# Altium PCB PCB.PcbDoc
Units mm, origin at the board's own origin, x right, y up, seen from the top; angles counter-clockwise.
Board outline 65 x 65 mm, 4 copper layers (Top Layer, Int1, Int2, Bottom Layer), stack 1.369 mm thick; 92 components, 54 nets, 330 pads, 9 vias.
Unrouted connection lines stored in the file: 207.
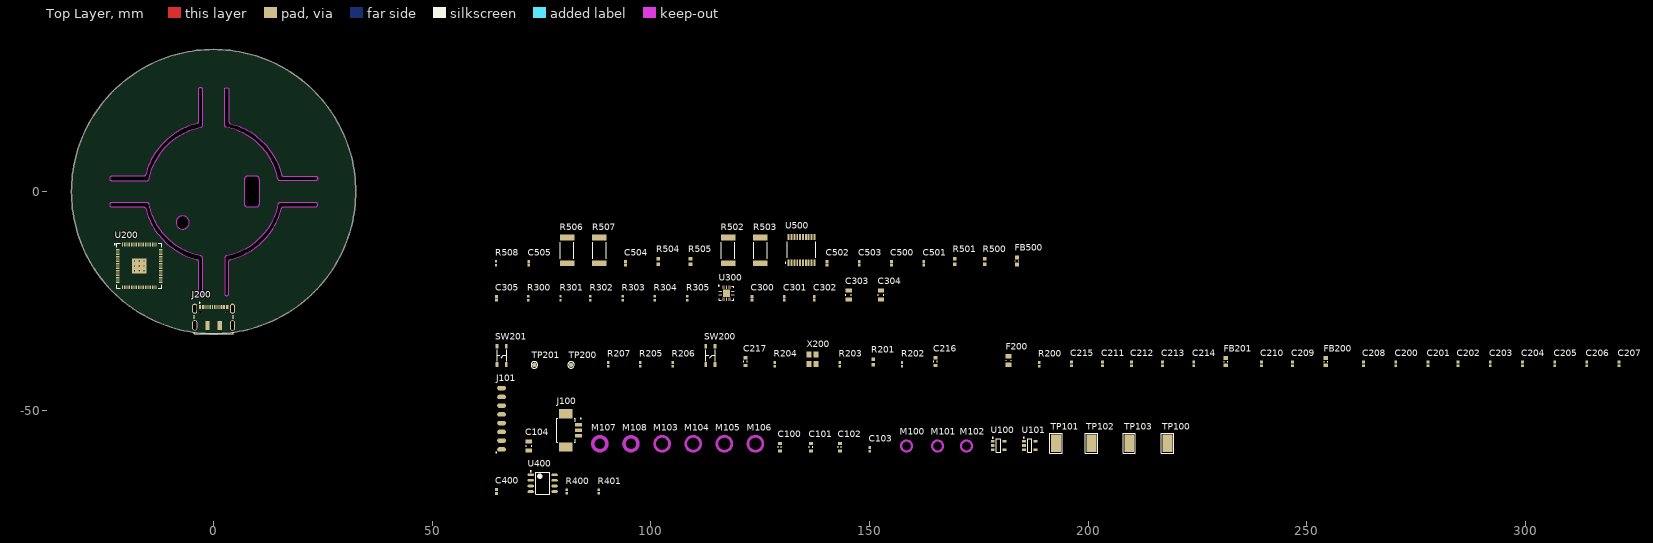
[diagram p0: Top Layer view]
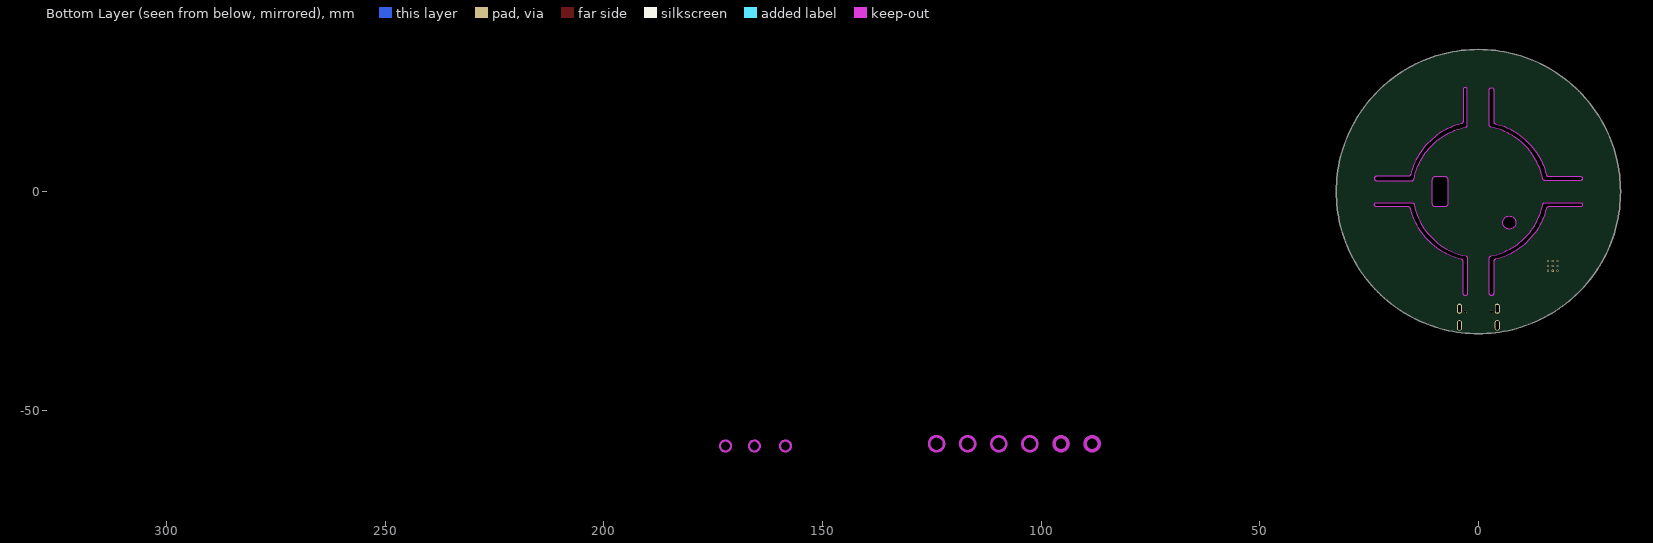
[diagram p1: Bottom Layer view, seen from below]

## Layer stack, top to bottom
Top Solder: solder mask 0.0254, SM-001, Dk 4
Top Layer: signal copper 0.035
Dielectric 1: prepreg 0.1295, PP-017, Dk 4.3
Dielectric 2: prepreg 0.1295, PP-017, Dk 4.3
Int1: signal copper 0.035
Dielectric 3: core 0.7112, Core-039, Dk 4.8
Int2: signal copper 0.035
Dielectric 4: prepreg 0.1295, PP-017, Dk 4.3
Dielectric 5: prepreg 0.1295, PP-017, Dk 4.3
Bottom Layer: signal copper 0.035
Bottom Solder: solder mask 0.0254, SM-001, Dk 4

## Board outline
-32.5,0 ccw(c0,0) 0,-32.5 ccw(c0,0) 32.5,0 ccw(c0,0) 0,32.5 ccw(c0,0)
cut-out: 7,-2.75 ccw(c7.75,-2.75) 7.75,-3.5 9.75,-3.5 ccw(c9.75,-2.75) 10.5,-2.75 10.5,2.75 ccw(c9.75,2.75) 9.75,3.5 7.75,3.5 ccw(c7.75,2.75) 7,2.75
cut-out: 2.5,23.29 cw(c3,23.29) 3.5,23.29 3.502,16.007 ccw(c4.002,16.007) 3.88,15.522 cw(c0,0) 15.522,3.881 ccw(c16.008,4.002) 16.007,3.502 16.007,3.5 23.29,3.5 cw(c23.29,3) 23.29,2.5 15.207,2.5 cw(c15.207,3) 14.716,2.903 14.715,2.908 ccw(c0,0) 2.913,14.714 cw(c3.01,15.205) 2.51,15.205
cut-out: -23.29,2.5 -15.205,2.51 ccw(c-15.205,3.01) -14.714,2.913 cw(c0,0) -2.908,14.715 -2.903,14.716 ccw(c-3,15.207) -2.5,15.207 -2.5,23.29 ccw(c-3,23.29) -3.5,23.29 -3.5,16.007 -3.502,16.007 cw(c-4.002,16.007) -3.88,15.522 ccw(c0,0) -15.522,3.881 cw(c-16.007,4.002) -16.007,3.502 -23.29,3.5 ccw(c-23.29,3)
cut-out: 2.5,-23.29 ccw(c3,-23.29) 3.5,-23.29 3.5,-16.007 3.502,-16.007 cw(c4.002,-16.007) 3.88,-15.522 ccw(c0,0) 15.522,-3.881 cw(c16.007,-4.002) 16.007,-3.502 23.29,-3.5 ccw(c23.29,-3) 23.29,-2.5 15.205,-2.51 ccw(c15.205,-3.01) 14.714,-2.913 cw(c0,0) 2.908,-14.715 2.903,-14.716 ccw(c3,-15.207) 2.5,-15.207
cut-out: -23.29,-3.5 -16.007,-3.5 -16.007,-3.502 cw(c-16.007,-4.002) -15.522,-3.88 ccw(c0,0) -3.881,-15.522 cw(c-4.002,-16.007) -3.502,-16.007 -3.5,-23.29 ccw(c-3,-23.29) -2.5,-23.29 -2.51,-15.205 ccw(c-3.01,-15.205) -2.913,-14.714 cw(c0,0) -14.715,-2.908 -14.716,-2.903 ccw(c-15.207,-3) -15.207,-2.5 -23.29,-2.5 ccw(c-23.29,-3)
cut-out: -8.571,-7.071 ccw(c-7.071,-7.071) -7.071,-8.571 ccw(c-7.071,-7.071) -5.571,-7.071 ccw(c-7.071,-7.071) -7.071,-5.571 ccw(c-7.071,-7.071)

## Design rules (kind name [scope] priority, off if disabled: settings)
Clearance [All] p1: gap=0.254 ignorepadtopadclearanceinfootprint=FALSE
DiffPairsRouting [All] p1: maxlimit=0.254 minlimit=0.254 mostfreqgap=0.254 toplayer_minwidth=0.381 toplayer_maxwidth=0.381 toplayer_prefwidth=0.381 midlayer1_minwidth=0.381 midlayer1_maxwidth=0.381 midlayer1_prefwidth=0.381 midlayer2_minwidth=0.381 midlayer2_maxwidth=0.381 midlayer2_prefwidth=0.381 bottomlayer_minwidth=0.381 bottomlayer_maxwidth=0.381 bottomlayer_prefwidth=0.381 maxuncoupledlength=12.7
PolygonConnect [All] p1: connectstyle=Relief reliefconductorwidth=0.254 reliefentries=4 polygonreliefangle="90 Angle" airgapwidth=0.254
RoutingVias [All] p1: holewidth=0.711 width=1.27 viastyle="Through Hole" minholewidth=0.711 minwidth=1.27 maxholewidth=0.711 maxwidth=1.27
SolderMaskExpansion [All] p1: expansion=0 istentingtop=FALSE
SupplyNets "Schematic Supply Nets_5" [InNet('+3V3')] p1: voltage=0.000
SupplyNets "Schematic Supply Nets_4" [InNet('AGND')] p2: voltage=0.000
SupplyNets "Schematic Supply Nets_3" [InNet('GND')] p3: voltage=0.000
SupplyNets "Schematic Supply Nets_2" [InNet('P5VUSB')] p4: voltage=0.000
SupplyNets "Schematic Supply Nets_1" [InNet('P1V1')] p5: voltage=0.000
SupplyNets "Schematic Supply Nets" [InNet('P3V3')] p6: voltage=0.000
Width [All] p1: maxlimit=0.254 minlimit=0.254 preferedwidth=0.254
29 further rules are at their usual default settings.

## Classes and differential pairs
component class Strain_sensor: C500 C501 C502 C503 C504 C505 FB500 R500 R501 R502 R503 R504 R505 R506 R507 R508 U500
component class Motor_driver: C300 C301 C302 C303 C304 C305 R300 R301 R302 R303 R304 R305 U300
component class Microcontroller: C200 C201 C202 C203 C204 C205 C206 C207 C208 C209 C210 C211 C212 C213 C214 C215 C216 C217 F200 FB200 FB201 J200 R200 R201 R202 R203 R204 R205 R206 R207 SW200 SW201 TP200 TP201 U200 X200
component class Main: C100 C101 C102 C103 C104 J100 J101 M100 M101 M102 M103 M104 M105 M106 M107 M108 TP100 TP101 TP102 TP103 U100 U101
component class Magnetic_encoder: C400 R400 R401 U400
differential pair USB: +USB_P -USB_N

## Components (designator, comment, footprint, x,y, rotation, side; value= is the part's Value field where it differs from the comment)
C100 "CAP" C0603 129.475,-58.424 r90 top value=1uF
C101 "CAP" C0603 136.587,-58.424 r90 top value=1uF
C102 "CAP" C0603 143.191,-58.424 r90 top value=1uF
C103 "CAP" C0402 150.049,-58.932 r90 top value=1uF
C104 "CAP" C0805 72.071,-58.17 r90 top value=10uF
C200 "CAP" C0402 270.318,-39.374 r90 top value=100nF
C201 "CAP" C0402 277.684,-39.374 r90 top value=100nF
C202 "CAP" C0402 284.542,-39.374 r90 top value=100nF
C203 "CAP" C0402 291.908,-39.374 r90 top value=100nF
C204 "CAP" C0402 299.274,-39.374 r90 top value=100nF
C205 "CAP" C0402 306.64,-39.374 r90 top value=100nF
C206 "CAP" C0402 314.006,-39.374 r90 top value=100nF
C207 "CAP" C0402 321.372,-39.374 r90 top value=100nF
C208 "CAP" C0402 262.952,-39.374 r90 top value=4.7uF
C209 "CAP" C0402 246.696,-39.374 r90 top value=1uF
C210 "CAP" C0402 239.584,-39.374 r90 top value=100nF
C211 "CAP" C0402 203.262,-39.374 r90 top value=100nF
C212 "CAP" C0402 209.866,-39.374 r90 top value=100nF
C213 "CAP" C0402 216.978,-39.374 r90 top value=100nF
C214 "CAP" C0402 224.09,-39.374 r90 top value=100nF
C215 "CAP" C0402 196.15,-39.374 r90 top value=1uF
C216 "CAP" C0603 165.035,-38.866 r90 top value=33pF
C217 "CAP" C0603 121.601,-38.866 r90 top value=33pF
C300 "CAP" C0402 123.125,-24.388 r90 top value=100nF
C301 "CAP" C0402 130.491,-24.388 r90 top value=100nF
C302 "CAP" C0402 137.349,-24.388 r90 top value=100nF
C303 "CAP" C0805 145.223,-23.626 r90 top value=10uF
C304 "CAP" C0805 152.589,-23.626 r90 top value=10uF
C305 "CAP" C0402 64.705,-24.388 r90 top value=100nF
C400 "CAP" C0402 64.705,-68.584 r90 top value=100nF
C500 "CAP" C0402 155.002,-16.387 r90 top value=100nF
C501 "CAP" C0402 162.368,-16.387 r90 top value=100nF
C502 "CAP" C0402 140.27,-16.387 r90 top value=100nF
C503 "CAP" C0402 147.636,-16.387 r90 top value=100nF
C504 "CAP" C0402 94.169,-16.387 r90 top value=1uF
C505 "CAP" C0402 72.071,-16.387 r90 top value=1uF
F200 "F_PTC" F0805 181.799,-38.612 r90 top value="500 mA"
FB200 "FBEAD" 0603_IND 254.316,-38.866 r90 top value=600Ohm/100MHz
FB201 "FBEAD" 0603_IND 231.456,-38.866 r90 top value=600Ohm/100MHz
FB500 "FBEAD" 0603_IND 183.704,-15.879 r90 top
J100 "Conn-3pos" 0532610371 81.977,-54.614 r90 top
J101 "Conn-8pos" 2mm_pads_8 65.848,-51.947 r90 top
J200 "DX07S016JA1R1500" DX07S016JA1R1500 0,-29 r0 top
M100 "Mounting_Hole_Unplated" M1.6_Close_Unplated 158.431,-58.17 r0 top
M101 "Mounting_Hole_Unplated" M1.6_Close_Unplated 165.543,-58.17 r0 top
M102 "Mounting_Hole_Unplated" M1.6_Close_Unplated 172.147,-58.17 r0 top
M103 "Mounting_Hole_Unplated" M2_Normal_Unplated 102.551,-57.662 r0 top
M104 "Mounting_Hole_Unplated" M2_Normal_Unplated 109.663,-57.662 r0 top
M105 "Mounting_Hole_Unplated" M2_Normal_Unplated 116.775,-57.662 r0 top
M106 "Mounting_Hole_Unplated" M2_Normal_Unplated 123.887,-57.662 r0 top
M107 "Mounting_Hole_Unplated" M2_Close_Unplated 88.327,-57.662 r0 top
M108 "Mounting_Hole_Unplated" M2_Close_Unplated 95.439,-57.662 r0 top
R200 "RES" R0402 188.784,-39.501 r90 top value=5K1
R201 "RES" R0603 150.811,-38.993 r90 top value=1K
R202 "RES" R0402 157.415,-39.501 r90 top value=27R
R203 "RES" R0402 143.191,-39.501 r90 top value=27R
R204 "RES" R0402 128.332,-39.501 r90 top value=10K
R205 "RES" R0402 97.598,-39.501 r90 top value=10K
R206 "RES" R0402 104.964,-39.501 r90 top value=5K1
R207 "RES" R0402 90.232,-39.501 r90 top value=1K
R300 "RES" R0402 71.944,-24.388 r90 top value=10K
R301 "RES" R0402 79.31,-24.388 r90 top value=10K
R302 "RES" R0402 86.168,-24.388 r90 top value=10K
R303 "RES" R0402 93.534,-24.388 r90 top value=10K
R304 "RES" R0402 100.9,-24.388 r90 top value=10K
R305 "RES" R0402 108.266,-24.388 r90 top value=10K
R400 "RES" R0402 80.707,-68.584 r90 top value=2K2
R401 "RES" R0402 88.073,-68.584 r90 top value=2K2
R500 "RES" R0603 176.338,-16.006 r90 top value=10R
R501 "RES" R0603 169.48,-16.006 r90 top value=10R
R502 "RES" R2512 117.664,-13.466 r90 top value=330R
R503 "RES" R2512 125.03,-13.466 r90 top value=330R
R504 "RES" R0603 101.662,-16.006 r90 top value=100R
R505 "RES" R0603 109.028,-16.006 r90 top value=100R
R506 "RES" R2512 80.834,-13.466 r90 top value=330R
R507 "RES" R2512 88.2,-13.466 r90 top value=330R
R508 "RES" R0402 64.578,-16.387 r90 top value=0R
SW200 "Pushbutton" 434133025816 113.6,-37.469 r90 top
SW201 "Pushbutton" 434133025816 65.848,-37.469 r90 top
TP100 "Testpoint" 5019 218.121,-57.535 r90 top
TP101 "Testpoint" 5019 192.594,-57.535 r90 top
TP102 "Testpoint" 5019 200.722,-57.535 r90 top
TP103 "Testpoint" 5019 209.358,-57.535 r90 top
TP200 "SWCLK" TP_SMD 81.723,-39.628 r90 top
TP201 "SWDIO" TP_SMD 73.341,-39.628 r90 top
U100 "XC6222" SOT-25-5 179.513,-58.043 r0 top value=3.3V
U101 "XC6222" SOT-25-5 186.625,-58.043 r0 top value=1.1V
U200 "RP235xB" RP235xB -17,-17 r0 top
U300 "TMC6300" TMC6300 117.283,-23.245 r0 top
U400 "MT6701" SOP-8 75.246,-66.679 r0 top
U500 "MCP3564R" 20-TSSOP 134.428,-13.339 r0 top
X200 "XTAL-4" "XTAL 3.2x2.5mm" 136.968,-38.358 r90 top value="12 MHz"

## Footprints (in the part's own frame and the unit in brackets; to place one, negate y for a bottom-side part, rotate by r counter-clockwise, add the part's x,y. Pads: shape width x height; smd on the part's side, far side on the other; paste and mask are expansions set on the pad)
2mm_pads_8 [mm]
  oval 1x2 smd paste-2539.97: 1(-7,0) 2(-5,0) 3(-3,0) 4(-1,0) 5(1,0) 6(3,0) 7(5,0) 8(7,0)
  silkscreen extent -7.8,1.1 -7.6,1.3
20-TSSOP [mm]
  rect 0.45x1.45 smd mask+0.075: 1(-2.925,-2.95) 2(-2.275,-2.95) 3(-1.625,-2.95) 4(-0.975,-2.95) 5(-0.325,-2.95) 6(0.325,-2.95) 7(0.975,-2.95) 8(1.625,-2.95) 9(2.275,-2.95) 10(2.925,-2.95) 11(2.925,2.95) 12(2.275,2.95) 13(1.625,2.95) 14(0.975,2.95) 15(0.325,2.95) 16(-0.325,2.95) 17(-0.975,2.95) 18(-1.625,2.95) 19(-2.275,2.95) 20(-2.925,2.95)
  silkscreen extent -3.77,-3.05 3.25,1.9, body extent -3.3,-3.2 3.3,3.2, height 1.2
0603_IND [mm]
  rect 0.87x0.98 smd: 1(-0.82,0) 2(0.82,0)
  silkscreen extent -0.1,-0.39 0.1,0.39, body extent -0.87,-0.48 0.87,0.48, height 0.95
5019 [mm]
  rect 4x2.25 smd: 1(0,0)
  silkscreen extent -2.29,-1.4 2.29,1.4, body extent -1.91,-1.01 1.91,1.01, height 2.29
0532610371 [mm]
  rect 0.8x1.6 smd: 1(1.25,-1.45) 2(0,-1.45) 3(-1.25,-1.45)
  rect 2.1x3 smd: ""(-3.8,1.45) ""(3.8,1.45)
  silkscreen extent -2.75,-2.05 2.85,3.55, body extent -4.45,-1.65 4.45,3.55, height 3.2
434133025816 [mm]
  rect 1.05x0.65 smd: 1(-2.075,1.075) 1(2.075,1.075) 2(-2.075,-1.075) 2(2.075,-1.075)
  silkscreen extent -1.27,-1.14 1.27,1.02, body extent -2.6,-1.6 2.6,1.6, height 2.7
C0402 [mm]
  rect 0.66x0.62 smd: 1(-0.44,0) 2(0.44,0)
  body extent -0.53,-0.28 0.53,0.28, height 0.55
C0603 [mm]
  rect 0.7x0.95 smd: 1(-0.875,0) 2(0.875,0)
  silkscreen extent -0.15,-0.38 0.15,0.38, body extent -0.85,-0.45 0.85,0.45, height 0.9
C0805 [mm]
  rect 0.9x1.45 smd: 1(-1.025,0) 2(1.025,0)
  silkscreen extent -0.2,-0.63 0.2,0.63, body extent -1.1,-0.72 1.1,0.72, height 1.45
DX07S016JA1R1500 [mm]
  rect 0.52x1 smd: 1(-3.1,2.6) 2(-2.35,2.6) 11(2.35,2.6) 12(3.1,2.6)
  rect 0.27x1 smd: 3(-1.75,2.6) 4(-1.25,2.6) 5(-0.75,2.6) 6(-0.25,2.6) 7(0.25,2.6) 8(0.75,2.6) 9(1.25,2.6) 10(1.75,2.6)
  rect 1x2 smd: S1(-1.4,-1.6) S2(1.4,-1.6)
  oval 1.158x2.316 hole 0.65 slot 1.65 at 90 deg: S3(-4.32,2.225) S4(4.32,2.225)
  oval 1.2x2.4 hole 0.65 slot 1.95 at 90 deg: S5(-4.32,-1.6) S6(4.32,-1.6)
  round 0.63 hole 0.63 unplated: ""(-3,1.5) ""(3,1.5)
  silkscreen extent -4.47,-3.55 4.47,3.7, body extent -4.47,-3.98 4.47,2.92, height 3.31
F0805 [mm]
  rect 1x1.4 smd: 1(-0.95,0) 2(0.95,0)
  silkscreen extent -0.05,-0.6 0.05,0.6, body extent -1.1,-0.7 1.1,0.7, height 0.5
M1.6_Close_Unplated [mm]
  round 0 hole 1.7 unplated mask+1.5: 1(0,0)
  Keep-Out Layer circle w0.5: c0,0 r1.25
M2_Close_Unplated [mm]
  round 0 hole 2.2 unplated mask+2: 1(0,0)
  Keep-Out Layer circle w0.8: c0,0 r1.6
M2_Normal_Unplated [mm]
  round 0 hole 2.4 unplated mask+2: 1(0,0)
  Keep-Out Layer circle w0.6: c0,0 r1.7
R0402 [mm]
  rect 0.6x0.55 smd: 1(-0.425,0) 2(0.425,0)
  body extent -0.53,-0.28 0.53,0.28, height 0.4
R0603 [mm]
  rect 0.8x0.85 smd: 1(-0.65,0) 2(0.65,0)
  body extent -0.82,-0.43 0.82,0.43, height 0.5
R2512 [mm]
  rect 1.35x3.3 smd: 1(-2.925,0) 2(2.925,0)
  silkscreen extent -1.85,-1.55 1.85,1.55, body extent -3.25,-1.65 3.25,1.65, height 0.7
RP235xB [mm]
  oval 0.85x0.2 smd: 1(-4.9,3.8) 2(-4.9,3.4) 3(-4.9,3) 4(-4.9,2.6) 5(-4.9,2.2) 6(-4.9,1.8) 7(-4.9,1.4) 8(-4.9,1) 9(-4.9,0.6) 10(-4.9,0.2) 11(-4.9,-0.2) 12(-4.9,-0.6) 13(-4.9,-1) 14(-4.9,-1.4) 15(-4.9,-1.8) 16(-4.9,-2.2) 17(-4.9,-2.6) 18(-4.9,-3) 19(-4.9,-3.4) 20(-4.9,-3.8) 41(4.9,-3.8) 42(4.9,-3.4) 43(4.9,-3) 44(4.9,-2.6) 45(4.9,-2.2) 46(4.9,-1.8) 47(4.9,-1.4) 48(4.9,-1) 49(4.9,-0.6) 50(4.9,-0.2) 51(4.9,0.2) 52(4.9,0.6) 53(4.9,1) 54(4.9,1.4) 55(4.9,1.8) 56(4.9,2.2) 57(4.9,2.6) 58(4.9,3) 59(4.9,3.4) 60(4.9,3.8)
  oval 0.2x0.85 smd: 21(-3.8,-4.9) 22(-3.4,-4.9) 23(-3,-4.9) 24(-2.6,-4.9) 25(-2.2,-4.9) 26(-1.8,-4.9) 27(-1.4,-4.9) 28(-1,-4.9) 29(-0.6,-4.9) 30(-0.2,-4.9) 31(0.2,-4.9) 32(0.6,-4.9) 33(1,-4.9) 34(1.4,-4.9) 35(1.8,-4.9) 36(2.2,-4.9) 37(2.6,-4.9) 38(3,-4.9) 39(3.4,-4.9) 40(3.8,-4.9) 61(3.8,4.9) 62(3.4,4.9) 63(3,4.9) 64(2.6,4.9) 65(2.2,4.9) 66(1.8,4.9) 67(1.4,4.9) 68(1,4.9) 69(0.6,4.9) 70(0.2,4.9) 71(-0.2,4.9) 72(-0.6,4.9) 73(-1,4.9) 74(-1.4,4.9) 75(-1.8,4.9) 76(-2.2,4.9) 77(-2.6,4.9) 78(-3,4.9) 79(-3.4,4.9) 80(-3.8,4.9)
  rect 3.4x3.4 smd: 81(0,0)
  silkscreen extent -5.69,-5.15 5.15,5.15, body extent -5,-5 5,5, height 0.9
SOP-8 [mm]
  oval 1.45x0.6 smd: 1(-2.725,1.905) 2(-2.725,0.635) 3(-2.725,-0.635) 4(-2.725,-1.905) 5(2.725,-1.905) 6(2.725,-0.635) 7(2.725,0.635) 8(2.725,1.905)
  silkscreen extent -2.85,-2.55 1.6,2.88, body extent -3,-2.55 3,2.55, height 1.75
SOT-25-5 [mm]
  rect 0.9x0.6 smd: 1(-1.35,0.95) 2(-1.35,0) 3(-1.35,-0.95) 4(1.35,-0.95) 5(1.35,0.95)
  silkscreen extent -1.47,-1.55 0.5,1.92, body extent -1.4,-1.55 1.4,1.55, height 1.3
TMC6300 [mm]
  rect 0.8x0.2 smd: 1(-1.425,0.8) 2(-1.425,0.4) 3(-1.425,0) 4(-1.425,-0.4) 5(-1.425,-0.8) 11(1.425,-0.8) 12(1.425,-0.4) 13(1.425,0) 14(1.425,0.4) 15(1.425,0.8)
  rect 0.2x0.8 smd: 6(-0.8,-1.425) 7(-0.4,-1.425) 8(0,-1.425) 9(0.4,-1.425) 10(0.8,-1.425) 16(0.8,1.425) 17(0.4,1.425) 18(0,1.425) 19(-0.4,1.425) 20(-0.8,1.425)
  rect 1.7x1.7 smd: 21(0,0)
  silkscreen extent -1.87,-1.65 1.65,1.87, body extent -1.55,-1.55 1.55,1.55, height 0.9
TP_SMD [mm]
  round 1 smd: 1(0,0)
  silkscreen extent -0.75,-0.75 0.75,0.75
"XTAL 3.2x2.5mm" [mm]
  rect 1.4x1.15 smd paste-0.1: 1(-1.1,-0.8) 2(1.1,-0.8) 3(1.1,0.8) 4(-1.1,0.8)
  body extent -1.6,-1.25 1.6,1.25, height 0.75

## Part data
C100 C101 C102: library part CGA3E1X7R1V105K080AC, "General purpose ceramic capacitor", Manufacturer="TDK Corporation", Package Ref=C0603, Supplier Part No=445-174215-1-ND, Voltage=35V, Fitted=Fitted, Generic=Generic, Manufacturer Part No=CGA3E1X7R1V105K080AC, Part Reference=CGA3E1X7R1V105K080AC, Ready for use=y, Specification="X7R, 35V, AEC-Q200 Qualified", Supplier=Digi-Key
C103 C209 C215 C504 C505: library part GRT155R61A105KE01D, "General purpose ceramic capacitor", Manufacturer="Murata Electronics", Package Ref=C0402, Supplier Part No=490-GRT155R61A105KE01DCT-ND, Voltage=10V, Fitted=Fitted, Generic=Generic, Manufacturer Part No=GRT155R61A105KE01D, Part Reference=GRT155R61A105KE01D, Ready for use=y, Specification="X5R, 10V, AEC-Q200 Qualified", Supplier=Digi-Key
C104 C303 C304: library part CGA4J1X7S1C106K125AC, "General purpose ceramic capacitor", Manufacturer="TDK Corporation", Package Ref=C0805, Supplier Part No=445-16110-1-ND, Voltage=16V, Fitted=Fitted, Generic=Generic, Manufacturer Part No=CGA4J1X7S1C106K125AC, Part Reference=CGA4J1X7S1C106K125AC, Ready for use=y, Specification="X7S, 16V, AEC-Q200 Qualified", Supplier=Digi-Key
C200 C201 C202 C203 C204 C205 C206 C207 C210 C211 C212 C213 C214 C300 C301 C302 C305 C400 C500 C501 C502 C503: library part GRT155R71H104KE01D, "General purpose ceramic capacitor", Manufacturer="Murata Electronics", Package Ref=C0402, Supplier Part No=490-GRT155R71H104KE01DCT-ND, Voltage=50V, Fitted=Fitted, Generic=Generic, Manufacturer Part No=GRT155R71H104KE01D, Part Reference=GRT155R71H104KE01D, Ready for use=y, Specification="X7R, 50V, AEC-Q200 Qualified", Supplier=Digi-Key
C208: library part GRT155R61A475ME13D, "General purpose ceramic capacitor", Manufacturer="Murata Electronics", Package Ref=C0402, Supplier Part No=490-GRT155R61A475ME13DCT-ND, Voltage=10V, Fitted=Fitted, Generic=Generic, Manufacturer Part No=GRT155R61A475ME13D, Part Reference=GRT155R61A475ME13D, Ready for use=y, Specification="X5R, 10V, AEC-Q200 Qualified", Supplier=Digi-Key
C216 C217: library part CGA3E2C0G1H330J080AA, "General purpose ceramic capacitor", Manufacturer="TDK Corporation", Package Ref=C0603, Supplier Part No=445-5634-1-ND, Voltage=50V, Fitted=Fitted, Generic=Generic, Manufacturer Part No=CGA3E2C0G1H330J080AA, Part Reference=CGA3E2C0G1H330J080AA, Ready for use=y, Specification="C0G, 50V, AEC-Q200 Qualified", Supplier=Digi-Key
F200: library part MF-PSMF050X-2, "PTC resettable SMD fuse", Manufacturer="Bourns Inc", Package Ref=F0805, Supplier Part No=MF-PSMF050X-2CT-ND, Fitted=Fitted, Generic=Generic, Manufacturer Part No=MF-PSMF050X-2, Part Reference=MF-PSMF050X-2, Ready for use=y, Specification="6V rated", Supplier=Digi-Key
FB200 FB201: library part BLM18KG601SH1D, "Ferrite bead", Manufacturer="Murata Electronics", Package Ref=0603_IND, Supplier Part No=490-13259-1-ND, Fitted=Fitted, Generic=Generic, Manufacturer Part No=BLM18KG601SH1D, Part Reference=BLM18KG601SH1D, Ready for use=y, Specification="1.3A max, AEC-Q200 Qualified", Supplier=Digi-Key
FB500: library part FBTH1608HL221-T, "Ferrite bead", Manufacturer="Taiyo Yuden", Package Ref=0603_IND, Supplier Part No=587-FBTH1608HL221-TCT-ND, Fitted=Fitted, Generic=Generic, Manufacturer Part No=FBTH1608HL221-T, Part Reference=FBTH1608HL221-T, Ready for use=y, Specification="650mA max, AEC-Q200 Qualified", Supplier=Digi-Key
J100: library part 0532610371, "3 pin horizontal picoblade connector", Manufacturer=Molex, Supplier Part No=WM7621CT-ND, Fitted=Fitted, Generic="Non Generic", Manufacturer Part No=0532610371, Package Ref=0532610371, Part Reference=0532610371, Ready for use=y, Specification="125 V 1 A max", Supplier=Digi-Key
J101: library part 2mm_pads_8, "2mm pitch solder pads", Fitted=Fitted, Generic=Generic, Manufacturer Part No=2mm_pads_8, Package Ref=2mm_pads_8, Part Reference=2mm_pads_8, Ready for use=n
J200: "USB 2.0 Type C connector", Manufacturer="JAE Electronics", Supplier Part No=670-DX07S016JA1R1500CT-ND, Fitted=Fitted, Generic="Non Generic", Manufacturer Part No=DX07S016JA1R1500, Package Ref=DX07S016JA1R1500, Part Reference=DX07S016JA1R1500, Ready for use=y, Supplier=Digi-Key
M100 M101 M102: library part M1.6_Close_Unplated, "M1.6 Hole, Unplated", Fitted=Fitted, Generic=Generic, Package Ref=M1.6_Close_Unplated, Part Reference=M1.6_Close_Unplated, Ready for use=y, Specification="Close clearance"
M103 M104 M105 M106: library part M2_Normal_Unplated, "M2 Hole, Unplated", Fitted=Fitted, Generic=Generic, Package Ref=M2_Normal_Unplated, Part Reference=M2_Normal_Unplated, Ready for use=y, Specification="Normal clearance"
M107 M108: library part M2_Close_Unplated, "M2 Hole, Unplated", Fitted=Fitted, Generic=Generic, Package Ref=M2_Close_Unplated, Part Reference=M2_Close_Unplated, Ready for use=y, Specification="Close clearance"
R200 R202 R203 R204 R205 R206 R207 R300 R301 R302 R303 R304 R305 R400 R401 R508: library part "Generic 0402 resistor", "General purpose resistor", Manufacturer=N/A, Manufacturer Part No="Generic resistor", Package Ref=R0402, Generic=Generic, Part Reference="Generic 0402 resistor", Ready for use=y, Supplier=N/A, Supplier Part No=N/A
  R200 R202 R203 R204 R206 R207 R300 R301 R302 R303 R304 R305 R400 R401 R508: Fitted=Fitted
  R205: Fitted="Not Fitted"
R201: library part CRCW06031K00JNEA, "General purpose automotive thick film resistor", Manufacturer="Vishay Dale", Package Ref=R0603, Supplier Part No=541-1.0KGCT-ND, Fitted=Fitted, Generic=Generic, Manufacturer Part No=CRCW06031K00JNEA, Part Reference=CRCW06031K00JNEA, Ready for use=y, Specification="5%, 200ppm, 0.1W, AEC-Q200 Qualified", Supplier=Digi-Key
R500 R501: library part CRCW060310R0JNEA, "General purpose automotive thick film resistor", Manufacturer="Vishay Dale", Package Ref=R0603, Supplier Part No=541-10GCT-ND, Fitted=Fitted, Generic=Generic, Manufacturer Part No=CRCW060310R0JNEA, Part Reference=CRCW060310R0JNEA, Ready for use=y, Specification="5%, 200ppm, 0.1W, AEC-Q200 Qualified", Supplier=Digi-Key
R502 R503 R506 R507: library part CRCW2512330RJNEG, "General purpose automotive thick film resistor", Manufacturer="Vishay Dale", Package Ref=R2512, Supplier Part No=541-330XCT-ND, Fitted=Fitted, Generic=Generic, Manufacturer Part No=CRCW2512330RJNEG, Part Reference=CRCW2512330RJNEG, Ready for use=y, Specification="5%, 200ppm, 1W, AEC-Q200 Qualified", Supplier=Digi-Key
R504 R505: library part CRCW0603100RJNEA, "General purpose automotive thick film resistor", Manufacturer="Vishay Dale", Package Ref=R0603, Supplier Part No=541-100GCT-ND, Fitted=Fitted, Generic=Generic, Manufacturer Part No=CRCW0603100RJNEA, Part Reference=CRCW0603100RJNEA, Ready for use=y, Specification="5%, 200ppm, 0.1W, AEC-Q200 Qualified", Supplier=Digi-Key
SW200 SW201: library part 434133025816, "SPST Tactile Switch 4.2x3.2 mm", Manufacturer="Wurth Elektronik", Supplier Part No=732-13663-1-ND, Fitted=Fitted, Generic="Non Generic", Manufacturer Part No=434133025816, Package Ref=434133025816, Part Reference=434133025816, Ready for use=y, Supplier=Digi-Key
TP100 TP101 TP102 TP103: library part 5019, "SMD Testpoint, loop style", Manufacturer="Keystone Electronics", Supplier Part No=36-5019CT-ND, Fitted=Fitted, Generic=Generic, Manufacturer Part No=5019, Package Ref=5019, Part Reference=5019, Ready for use=y, Supplier=Digi-Key
TP200 TP201: library part TP_SMD, "SMD Testpoint, pad style", Fitted=Fitted, Generic=Generic, Package Ref=TP_SMD, Part Reference=TP_SMD, Ready for use=y
U100: library part XC6222B331MR-G, "3.3V 700mA LDO linear regulator, 3.5-6V input", Manufacturer="Torex Semiconductor", Package Ref=SOT-25-5, Supplier Part No=893-1143-1-ND, Fitted=Fitted, Generic="Non Generic", Manufacturer Part No=XC6222B331MR-G, Part Reference=XC6222B331MR-G, Ready for use=y, Supplier=Digi-Key, Type=PMIC
U101: library part XC6222B111MR-G, "1.1V 700mA LDO linear regulator, 1.9-6V input", Manufacturer="Torex Semiconductor", Package Ref=SOT-25-5, Supplier Part No=893-XC6222B111MR-GCT-ND, Fitted=Fitted, Generic="Non Generic", Manufacturer Part No=XC6222B111MR-G, Part Reference=XC6222B111MR-G, Ready for use=n, Supplier=Digi-Key, Type=PMIC
U200: library part RP2354B, "Dual Core 150 MHz ARM-M33 Microcontroller with 2 MB Flash", Manufacturer="Raspberry Pi", Package Ref="QFN-80 (10x10)", Supplier Part No=2648-SC1512-A4CT-ND, Fitted=Fitted, Generic="Non Generic", Manufacturer Part No=RP2354B, Part Reference=RP2354B, Ready for use=y, Supplier=Digi-Key, Type=Microcontroller
U300: library part TMC6300-LA-T, "2-11V 2A 3-phase BLDC motor driver", Manufacturer="Trinamic Motion Control GmbH", Package Ref="QFN-20 (3x3)", Supplier Part No=1460-TMC6300-LA-TCT-ND, Fitted=Fitted, Generic="Non Generic", Manufacturer Part No=TMC6300-LA-T, Part Reference=TMC6300-LA-T, Ready for use=y, Supplier=Digi-Key, Type="Motor Driver"
U400: library part MT6701CT-STD, "Hall effect absolute magnetic encoder", Manufacturer=MagnTek, Package Ref=SOP-8, Supplier Part No=C2856764, Fitted=Fitted, Generic="Non Generic", Manufacturer Part No=MT6701CT-STD, Part Reference=MT6701CT-STD, Ready for use=y, Supplier=LCSC, Type=Sensor
U500: library part MCP3564RT-E/ST, "Low-noise 24-bit Delta-Sigma ADC, 2/4/8 ch single ended, 1/2/4 ch differential", Manufacturer="Microchip Technology", Package Ref=20-TSSOP, Supplier Part No=150-MCP3564RT-E/STCT-ND, Fitted=Fitted, Generic="Non Generic", Manufacturer Part No=MCP3564RT-E/ST, Part Reference=MCP3564RT-E/ST, Ready for use=y, Supplier=Digi-Key, Type=ADC
X200: library part ECS-120-20-33-CKM-TR, "12 MHz 10ppm crystal oscillator", Manufacturer="ECS Inc", Package Ref="XTAL 3.2x2.5mm", Supplier Part No=XC1810CT-ND, Comments="XTAL for RP2040", Fitted=Fitted, Generic="Non Generic", Manufacturer Part No=ECS-120-20-33-CKM-TR, Part Reference=ECS-120-20-33-CKM-TR, Ready for use=y, Specification="20pF, 100R", Supplier=Digi-Key

## Via types
v1: diameter 0.5, hole 0.2, Top Layer to Bottom Layer, 9 vias

## Nets (pads, with @x,y where several pads share a name; then routed paths per layer and width w, separated by ;. In a path a pad name is that pad's centre, name@x,y a point inside that pad or via, vN(x,y) a via of type N, cw(c..) or ccw(c..) an arc to the next point about the centre after c; other vN are vias at no path point)
+3V3: C104.1 J101.1
AGND: C500.2 C501.2 C504.2 C505.2 R506.1 R507.1 R508.1 U500.2 U500.3
BOOTSEL: R205.1 R207.2 U200.75
GND: C100.2 C101.2 C102.2 C103.2 C104.2 C200.2 C201.2 C202.2 C203.2 C204.2 C205.2 C206.2 C207.2 C208.2 C209.2 C210.2 C211.2 C212.2 C213.2 C214.2 C215.2 C216.1 C217.1 C300.2 C302.2 C303.2 C304.2 C305.2 C400.2 C502.2 C503.2 J101.2 J200.1 J200.12 R200.2 R206.1 R300.1 R301.1 R302.1 R303.1 R304.1 R305.1 R508.2 SW200.1 SW201.2 TP101.1 U100.2 U101.2 U200.62 U200.65 U200.81 U300.8 U300.9 U300.14 U300.16 U300.20 U300.21 U400.4 U500.19 X200.2 X200.4
  other v1: -18.1,-18.1 -17,-18.1 -15.9,-18.1 -18.1,-17 -17,-17 -15.9,-17 -18.1,-15.9 -17,-15.9 -15.9,-15.9
NetC209_1: C209.1 FB200.1 U200.61
NetC215_1: C215.1 FB201.2 U200.59
NetC216_2: C216.2 R201.1 X200.3
NetC300_1: C300.1 U300.13
NetC301_2: C301.2 U300.2
NetC500_1: C500.1 C501.1 R500.1 R502.2 R503.2 U500.1 U500.4
NetC502_1: C502.1 C503.1 R501.1 U500.20
NetF200_1: F200.1 J200.2 J200.11
NetFB500_1: FB500.1 R500.2
NetJ100_1: J100.1 U300.15
NetJ100_2: J100.2 U300.17
NetJ100_3: J100.3 U300.1
NetJ101_3: J101.3 U200.49
NetJ101_4: J101.4 U200.52
NetJ101_5: J101.5 U200.53
NetJ101_6: J101.6 U200.54
NetJ101_7: J101.7 U200.56
NetJ101_8: J101.8 U200.55
NetJ200_3: J200.3 R200.1
NetJ200_9: J200.9 R206.2
NetR202_1: R202.1 U200.67
NetR203_1: R203.1 U200.66
NetR207_1: R207.1 SW201.1
NetR300_2: R300.2 U200.42 U300.3
NetR301_2: R301.2 U200.44 U300.4
NetR302_2: R302.2 U200.46 U300.5
NetR303_2: R303.2 U200.43 U300.6
NetR304_2: R304.2 U200.45 U300.10
NetR305_2: R305.2 U200.47 U300.7
NetR400_1: R400.1 U200.20 U400.6 U500.16
NetR401_1: R401.1 U200.18 U400.7 U500.14
NetR502_1: R502.1 R504.2 R506.2
NetR503_1: R503.1 R505.1 R507.2
NetU200_16: U200.16 U500.17
NetU200_17: U200.17 U500.13
NetU200_19: U200.19 U500.15
NetU200_21: U200.21 U400.8
NetU200_48: U200.48 U300.12
P1V1: C103.1 C212.1 C213.1 C214.1 TP100.1 U101.5 U200.10 U200.32 U200.51
P3V3: C101.1 C102.1 C200.1 C201.1 C202.1 C203.1 C204.1 C205.1 C206.1 C207.1 C208.1 C210.1 C211.1 C305.1 C400.1 FB200.2 FB201.1 FB500.2 R204.2 R205.2 R400.2 R401.2 R501.2 TP103.1 U100.5 U101.1 U101.3 U200.5 U200.15 U200.24 U200.29 U200.41 U200.50 U200.60 U200.64 U200.68 U200.69 U200.76 U300.11 U400.1 U400.2
P5VUSB: C100.1 C301.1 C302.1 C303.1 C304.1 F200.2 TP102.1 U100.1 U100.3 U300.18
RUN: R204.1 SW200.2 U200.35
SENSE+: R504.1 U500.5
SENSE-: C504.1 R505.2 U500.6
SWCLK: TP200.1 U200.33
SWDIO: TP201.1 U200.34
USB_N: J200.5 J200.8 R203.2
USB_P: J200.6 J200.7 R202.2
XIN: C217.2 U200.30 X200.1
XOUT: R201.2 U200.31
pads on no net: C505.1 J100. J200. J200.4 J200.10 J200.S1 J200.S2 J200.S3 J200.S4 J200.S5 J200.S6 M100.1 M101.1 M102.1 M103.1 M104.1 M105.1 M106.1 M107.1 M108.1 U100.4 U101.4 U200.1 U200.2 U200.3 U200.4 U200.6 U200.7 U200.8 U200.9 U200.11 U200.12 U200.13 U200.14 U200.22 U200.23 U200.25 U200.26 U200.27 U200.28 U200.36 U200.37 U200.38 U200.39 U200.40 U200.57 U200.58 U200.63 U200.70 U200.71 U200.72 U200.73 U200.74 U200.77 U200.78 U200.79 U200.80 U300.19 U400.3 U400.5 U500.7 U500.8 U500.9 U500.10 U500.11 U500.12 U500.18

## Silkscreen, mask and mechanical layers (free items; w line width, h text height)
Board Shape:
  circle w0.1: c-7.071,-7.071 r1.5
  circle w0.1: c0,0 r32.5
  lines w0.1: -16.007,-3.502 cw(c-16.007,-4.002) -15.522,-3.88 ccw(c0,0) -3.881,-15.522 cw(c-4.002,-16.007) -3.502,-16.007 -3.5,-23.29 ccw(c-3,-23.29) -2.5,-23.29 -2.51,-15.205 ccw(c-3.01,-15.205) -2.913,-14.714 cw(c0,0) -14.715,-2.908 ; -16.007,-3.5 -23.29,-3.5 cw(c-23.29,-3) -23.29,-2.5 -15.207,-2.5 cw(c-15.207,-3) -14.716,-2.903 ; -3.502,16.007 cw(c-4.002,16.007) -3.88,15.522 ccw(c0,0) -15.522,3.881 cw(c-16.007,4.002) -16.007,3.502 -23.29,3.5 ccw(c-23.29,3) -23.29,2.5 -15.205,2.51 ccw(c-15.205,3.01) -14.714,2.913 cw(c0,0) -2.908,14.715 ; -3.5,16.007 -3.5,23.29 cw(c-3,23.29) -2.5,23.29 -2.5,15.207 cw(c-3,15.207) -2.903,14.716 ; 2.903,-14.716 ccw(c3,-15.207) 2.5,-15.207 2.5,-23.29 ccw(c3,-23.29) 3.5,-23.29 3.5,-16.007 ; 2.908,-14.715 ccw(c0,0) 14.714,-2.913 cw(c15.205,-3.01) 15.205,-2.51 23.29,-2.5 cw(c23.29,-3) 23.29,-3.5 16.007,-3.502 ccw(c16.007,-4.002) 15.522,-3.88 cw(c0,0) 3.881,-15.522 ccw(c4.002,-16.007) 3.502,-16.007 ; 14.715,2.908 ccw(c0,0) 2.913,14.714 cw(c3.01,15.205) 2.51,15.205 2.5,23.29 cw(c3,23.29) 3.5,23.29 3.502,16.007 ccw(c4.002,16.007) 3.88,15.522 cw(c0,0) 15.522,3.881 ccw(c16.007,4.002) 16.007,3.502 ; 14.716,2.903 ccw(c15.207,3) 15.207,2.5 23.29,2.5 ccw(c23.29,3) 23.29,3.5 16.007,3.5 ; 7,-2.75 ccw(c7.75,-2.75) 7.75,-3.5 9.75,-3.5 ccw(c9.75,-2.75) 10.5,-2.75 10.5,2.75 ccw(c9.75,2.75) 9.75,3.5 7.75,3.5 ccw(c7.75,2.75) 7,2.75 7,-2.75

## Text inside footprints (layer, text, board x,y; h text height)
J200: Assembly Notes "PCB EDGE" at 5.5,-32.25 h0.61